# EAGLE board eeZeeProp (EAGLE 6.3)
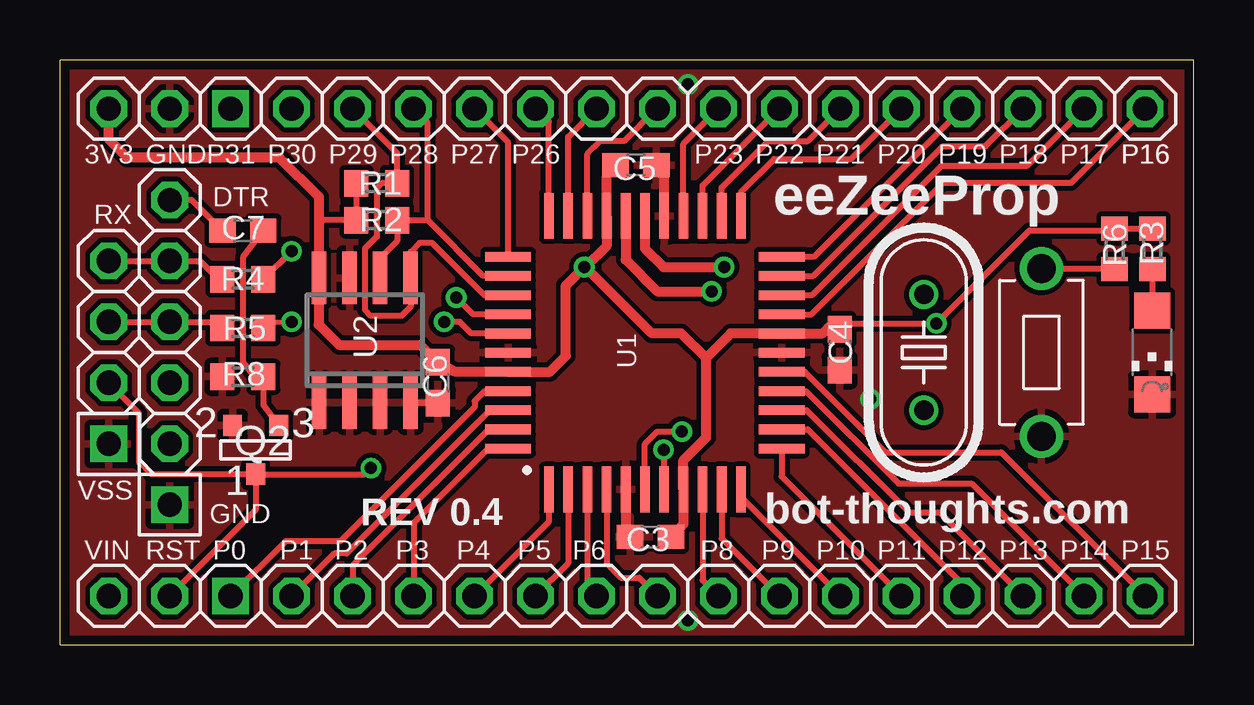
[diagram p0: board, top side]
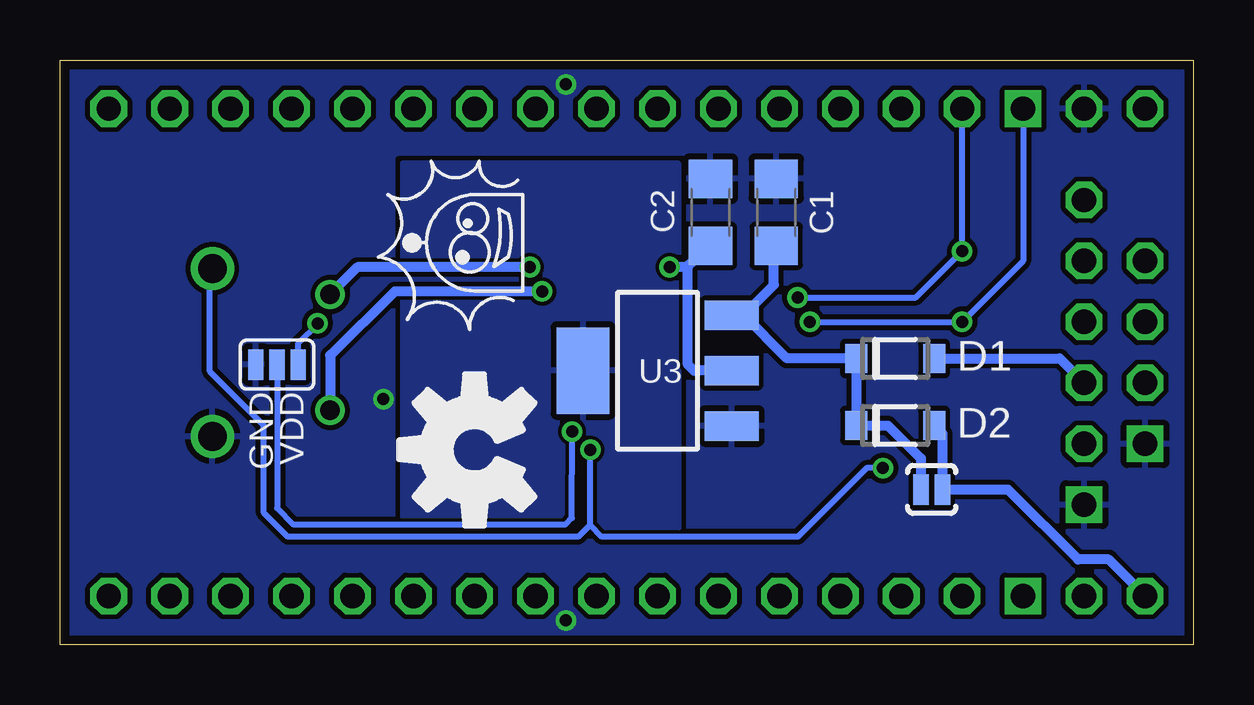
[diagram p1: board, bottom side, seen from below]

Size 47.24 x 24.38 mm. Coordinates in mm from the lower left corner, seen from the top.
Outline: 47.24,0 47.24,24.38 0,24.38 0,0 47.24,0
Copper layers (1*16): Top 0.0356mm / dielectric 1.5011mm / Bottom 0.0356mm
Design rules "default": minimum track width 6mil, minimum drill 13mil, track to track 6mil, track to pad 6mil, pad to pad 6mil, via to via 6mil, smd to smd 6mil, copper to edge 15mil, drill to drill 6mil, minimum pad ring 7mil, minimum via ring 7mil, stop-mask expansion 4mil, vias tented up to drill 20mil, thermal gap 10mil

## Footprints (pad centres in the part's own frame; a part is rotated, then mirrored left to right if it is on the bottom)
C1206 = smd 1.6 x 1.8: 1 -1.4,0; 2 1.4,0
C0603 = smd 1.1 x 1: 1 -0.85,0; 2 0.85,0
SOD123FL = smd 0.91 x 1.22: A 1.625,0; C -1.625,0
1X16-S = drill 1.016 square: 1 -19.05,0 | drill 1.016 octagon: 2 -16.51,0; 3 -13.97,0; 4 -11.43,0; 5 -8.89,0; 6 -6.35,0; 7 -3.81,0; 8 -1.27,0; 9 1.27,0; 10 3.81,0; 11 6.35,0; 12 8.89,0; 13 11.43,0; 14 13.97,0; 15 16.51,0; 16 19.05,0
1X01 = drill 1.016 octagon: 1 0,0
1X04-S = drill 1.016 square: 1 -3.81,0 | drill 1.016 octagon: 2 -1.27,0; 3 1.27,0; 4 3.81,0
1X06-S = drill 1.016 square: 1 -6.35,0 | drill 1.016 octagon: 2 -3.81,0; 3 -1.27,0; 4 1.27,0; 5 3.81,0; 6 6.35,0
CHIPLED_1206 = smd 1.5 x 1.5: A 0,-1.75; C 0,1.75
HC49U-V = drill 0.813: 1 -2.413,0; 2 2.413,0
SOT-23 = smd 0.787 x 0.889: 1 0.025,-1.016; 2 -0.94,1.016; 3 0.991,1.016
R0603 = smd 1 x 1.1: 1 -0.85,0; 2 0.85,0
SJ_2S-NO = smd 0.635 x 1.27: 1 -0.45,0; 2 0.45,0
SJ_3 = smd 0.635 x 1.27: 1 -0.889,0; 2 0,0; 3 0.889,0
6MMTACTILE_RECT = drill 1.2: P$1 -3.5,0; P$2 3.5,0
P8X32A-Q44 = smd 1.9 x 0.4: 1 -5.713,4.013; 2 -5.713,3.212; 3 -5.713,2.413; 4 -5.713,1.613; 5 -5.713,0.812; 6 -5.713,0.013; 7 -5.713,-0.787; 8 -5.713,-1.587; 9 -5.713,-2.388; 10 -5.713,-3.188; 11 -5.713,-3.987; 23 5.688,-3.987; 24 5.688,-3.188; 25 5.688,-2.388; 26 5.688,-1.587; 27 5.688,-0.787; 28 5.688,0.013; 29 5.688,0.812; 30 5.688,1.613; 31 5.688,2.413; 32 5.688,3.212; 33 5.688,4.013 | smd 0.4 x 1.9: 12 -4.013,-5.688; 13 -3.212,-5.688; 14 -2.413,-5.688; 15 -1.613,-5.688; 16 -0.812,-5.688; 17 -0.013,-5.688; 18 0.787,-5.688; 19 1.587,-5.688; 20 2.388,-5.688; 21 3.188,-5.688; 22 3.987,-5.688; 34 3.987,5.713; 35 3.188,5.713; 36 2.388,5.713; 37 1.587,5.713; 38 0.787,5.713; 39 -0.013,5.713; 40 -0.812,5.713; 41 -1.613,5.713; 42 -2.413,5.713; 43 -3.212,5.713; 44 -4.013,5.713
SO-08 = smd 0.6 x 2.2: 1 -1.905,-2.6; 2 -0.635,-2.6; 3 0.635,-2.6; 4 1.905,-2.6; 5 1.905,2.6; 6 0.635,2.6; 7 -0.635,2.6; 8 -1.905,2.6
SOT223 = smd 1.219 x 2.235: 1 -2.311,-3.099; 2 0,-3.099; 3 2.311,-3.099 | smd 3.6 x 2.2: 4 0,3.099

## Placement (x,y rotation side)
C1  10uF  [C1206]  17.4,18.03 90 bottom
C2  10uF  [C1206]  20.14,18.03 90 bottom
C3  0.1uF  [C0603]  24.6,4.5 180 top
C4  0.1uF  [C0603]  32.49,12.3 270 top
C5  0.1uF  [C0603]  24,20 0 top
C6  0.1uF  [C0603]  15.75,10.92 270 top
C7  0.1uF  [C0603]  7.62,17.27 180 top
D1  MBR130LSFT1  [SOD123FL]  12.45,11.94 0 bottom
D2  MBR130LSFT1  [SOD123FL]  12.45,9.14 0 bottom
JP1  [1X16-S]  26.16,22.35 0 top
JP2  VIN  [1X01]  2.03,2.03 0 top
JP3  PROP PLUG  [1X04-S]  2.03,12.19 90 top
JP4  FTDI  [1X06-S]  4.57,12.19 90 top
JP5  [1X16-S]  26.16,2.03 0 top
JP6  GND  [1X01]  4.57,22.35 0 top
JP7  !RES  [1X01]  4.57,2.03 0 top
JP8  3V3  [1X01]  2.03,22.35 0 top
LED1  green  [CHIPLED_1206]  45.5,12.19 180 top
Q1  5MHz  [HC49U-V]  35.99,12.19 90 top
Q2  2N3904SMD  [SOT-23]  8.13,8.13 0 top
R1  10k  [R0603]  13.2,19.25 180 top
R2  10k  [R0603]  13.2,17.7 180 top
R3  330  [R0603]  45.52,16.51 90 top
R4  1k  [R0603]  7.62,15.24 0 top
R5  1k  [R0603]  7.62,13.21 0 top
R6  1k  [R0603]  43.94,16.51 270 top
R8  10k  [R0603]  7.62,11.18 0 top
SJ1  BYPASS  [SJ_2S-NO]  10.92,6.48 180 bottom
SJ2  !BOE  [SJ_3]  38.2,11.68 0 bottom
SW1  RESET  [6MMTACTILE_RECT]  40.89,12.19 270 top
U1  P8X32A-Q44  [P8X32A-Q44]  24.38,12.19 90 top
U2  24LC256-I/ST  [SO-08]  12.7,12.7 0 top
U3  NCP1117 3V3  [SOT223]  22.35,11.43 90 bottom

## Library data of the parts
C1 C2 = rcl; PARTNO: T491A106M006AT; SIZE: (0603); TC: X5R; TOL: 20%; TYPE: CER; VOLT: 10V
C3-C5 = rcl; PARTNO: 0603YC104KAT2A; SIZE: (0603); TC: X5R; TOL: 20%; TYPE: CER; VOLT: 10V
C6 = rcl; DATABASE: ./../../eagle/PARTSDB.txt; PARTNO: 0603YC104KAT2A; SIZE: (0603); TC: X5R; TOL: 20%; TYPE: CER; VOLT: 10V
C7 = rcl; PARTNO: 0603YC104KAT2A
D1 D2 = mes_diode; PARTNO: MBR130LSFT1G
JP1 JP2 JP8 = pinhead-2; DATABASE: ./../../eagle/PARTSDB.txt
JP3 JP5-JP7 = pinhead-2
JP4 = pinhead-2; PARTNO: 2211S-06G
LED1 = led; PARTNO: LG N971-KN-1
Q1 = crystal; OC_FARNELL: 1666969; OC_NEWARK: unknown; PARTNO: HC49US-5.000MABJ-UB
Q2 = mes_transistors; PARTNO: MMBT3904LT3G
R1 = rcl; PARTNO: ERJ-3GEYJ103V; POWER: 100mW; RATE: 100mW; SIZE: (0603); TOL: 5%; TOLERANCE: 5%; TYPE: thick film; VENDOR: Newark; VOLTAGE: 75V; VPN: 52K8066
R2 = rcl; PARTNO: ERJ-3GEYJ103V; RATE: 100mW; SIZE: (0603); TOL: 5%
R3 = rcl; PARTNO: ERJ-3GEYJ331V; POWER: 100mW; TOLERANCE: 5%; TYPE: thick film; VENDOR: Newark; VPN: 59M6805
R4-R6 = rcl; DATABASE: ./../../eagle/PARTSDB.txt; PARTNO: RC0603JR-071KL; RATE: 100mW; SIZE: (0603); TOL: 5%
R8 = rcl; DATABASE: ./../../../eagle/PARTSDB.txt; PARTNO: ERJ-3GEYJ103V; RATE: 100mW; SIZE: (0603); TOL: 5%
SJ1 SJ2 = SparkFun
SW1 = mes_electromech; PARTNO: MJTP1243
U1 = parallax_propeller; PARTNO: P8X32A-Q44
U2 = microchip; MF: OnSemi; MPN: CAT24C256WI-GT3; OC_FARNELL: 9757937; OC_NEWARK: 30H1511; PARTNO: CAT24C256WI-GT3
U3 = SparkFun; PARTNO: NCP1117ST33T3G

## Nets
!BOE: SJ2.2 U1.6
!RES: JP3.2 JP7.1 Q2.1 R6.2 SW1.P$1 U1.7
DTR: C7.2 JP4.6
GND: C1.2 C2.2 C3.2 C4.2 C5.2 C6.2 JP3.1 JP4.1 JP6.1 LED1.C Q2.2 R8.1 SJ2.1 SW1.P$2 U1.5 U1.17 U1.27 U1.39 U2.1 U2.2 U2.3 U2.4 U2.7 U3.1
HEATSINK: U3.4
N$1: JP5.1 U1.41
N$2: JP5.2 U1.42
N$3: JP5.3 U1.43
N$4: JP5.4 U1.44
N$5: LED1.A R3.1
N$6: JP5.5 U1.1
N$8: JP5.6 U1.2
N$9: JP5.7 U1.3
N$10: JP5.8 U1.4
N$11: JP5.9 U1.9
N$12: JP5.10 U1.10
N$13: JP5.11 U1.11
N$14: JP5.12 U1.12
N$15: JP5.13 U1.13
N$16: JP5.14 U1.14
N$17: JP5.15 U1.15
N$18: JP5.16 U1.16
N$19: JP1.5 U1.34
N$20: JP1.6 U1.33
N$21: JP1.7 U1.32
N$22: JP1.8 U1.31
N$23: JP1.9 U1.26
N$24: JP1.10 U1.25
N$25: JP1.11 U1.24
N$26: JP1.12 U1.23
N$27: JP1.13 U1.22
N$28: JP1.14 U1.21
N$29: JP1.15 U1.20
N$30: JP1.16 U1.19
N$31: C7.1 Q2.3 R8.2
N$34: JP3.4 JP4.5 R4.1
N$35: JP3.3 JP4.4 R5.1
P28: JP1.4 R2.1 U1.35 U2.6
P29: JP1.3 R1.1 U1.36 U2.5
P30: JP1.2 R4.2 U1.37
P31: JP1.1 R5.2 U1.38
V+: C1.1 D1.C D2.C SJ1.2 U3.3
VDD: C2.1 C3.1 C4.1 C5.1 C6.1 JP8.1 R1.2 R2.2 R3.2 R6.1 SJ2.3 U1.8 U1.18 U1.30 U1.40 U2.8 U3.2
VIN: D2.A JP2.1 SJ1.1
VUSB: D1.A JP4.3
XI: Q1.2 U1.28
XO: Q1.1 U1.29

## Tracks (layer width: path | path; a pad name or v marks a point on that pad's centre or on a via)
!BOE  (via drill 0.5)
  Top 0.254: U1.6 24.37,8.37 24.89,8.89 v25.91,8.89
  Bottom 0.254: v25.91,8.89 25.91,5.28 26.2,5 37.5,5 38.2,5.7 SJ2.2
!RES  (via drill 0.5)
  Top 0.254: Q2.1 8.15,5.61 JP7.1 | Q2.1 3.81,7.11 3.3,7.62 3.3,9.65 JP3.2 | Q2.1 12.7,7.11 v12.95,7.37 | v25.15,8.13 25.15,6.5 U1.7 | R6.2 40.89,15.66 SW1.P$1
  Bottom 0.254: v12.95,7.37 13.63,7.37 16.5,4.5 24.67,4.5 25.16,4.99 | 25.16,4.99 v25.15,8.13 | 25.16,4.99 25.65,4.5 37.75,4.5 38.75,5.5 38.75,9.14 41,11.4 41,15.59 SW1.P$1
DTR
  Top 0.254: C7.2 6.76,17.27 5.49,18.54 JP4.6
GND  (via drill 0.5)
  Top 0.254: 25.17,19.68 C5.2 | C6.2 14.64,10.07 14.48,10.16
  Top 0.406: U1.5 23.57,4.68 C3.2 | U1.27 25.17,19.53 24.89,19.81
  other vias: 26.16,23.37 26.16,1.02 33.77,10.24
  pour Bottom (isolate 0.203, rank 3): 0,24.13 47.24,24.13 47.24,0.25 0,0.25
  pour Top (isolate 0.203, rank 5): 0.25,24.13 46.99,24.13 46.99,0.25 0.25,0.25
HEATSINK
  pour Bottom: 21.49,20.08 21.49,4.84 32.94,4.84 32.94,20.08
N$1
  Top 0.254: U1.41 17.69,10.58 17.27,10.16 17.27,9.91 11.68,4.32 9.4,4.32 JP5.1
N$2
  Top 0.254: U1.42 17.91,9.78 11.94,3.81 11.43,3.81 JP5.2
N$3
  Top 0.254: U1.43 17.87,8.98 12.19,3.3 JP5.3
N$4
  Top 0.254: JP5.4 14.73,5.08 17.91,8.26 U1.44
N$5
  Top 0.254: R3.1 LED1.A
N$6
  Top 0.254: U1.1 20.37,5.13 JP5.5
N$8
  Top 0.254: U1.2 21.17,3.39 JP5.6
N$9
  Top 0.254: U1.3 21.97,2.41 JP5.7
N$10
  Top 0.254: U1.4 22.77,3.39 23.37,2.79 24.13,2.79 JP5.8
N$11
  Top 0.254: U1.9 26.77,2.69 JP5.9
N$12
  Top 0.254: U1.10 27.57,4.43 JP5.10
N$13
  Top 0.254: U1.11 28.37,6.17 JP5.11
N$14
  Top 0.254: U1.12 30.07,7.01 JP5.12
N$15
  Top 0.254: U1.13 31.15,8.98 37.59,2.54 JP5.13
N$16
  Top 0.254: U1.14 31.11,9.78 35.38,5.51 36.65,5.51 JP5.14
N$17
  Top 0.254: U1.15 31.08,10.58 34.94,6.72 37.99,6.72 JP5.15
N$18
  Top 0.254: U1.16 31.04,11.38 34.39,8.03 39.22,8.03 JP5.16
N$19
  Top 0.254: U1.34 18.67,20.95 JP1.5
N$20
  Top 0.254: U1.33 20.37,21.79 JP1.6
N$21
  Top 0.254: U1.32 21.17,21.17 JP1.7
N$22
  Top 0.254: U1.31 21.97,20.47 22.5,21 23.5,21 24.85,22.35 JP1.8
N$23
  Top 0.254: U1.26 25.97,20.89 JP1.9
N$24
  Top 0.254: U1.25 26.77,19.15 JP1.10
N$25
  Top 0.254: U1.24 27.57,19.07 29.5,21 31.16,21 JP1.11
N$26
  Top 0.254: U1.23 28.37,18.87 29.75,20.25 32.95,20.25 JP1.12
N$27
  Top 0.254: U1.22 31.42,16.18 JP1.13
N$28
  Top 0.254: U1.21 31.38,15.38 36.78,20.78 38.56,20.78 JP1.14
N$29
  Top 0.254: U1.20 31.34,14.58 36.74,19.97 40.29,19.97 JP1.15
N$30
  Top 0.254: U1.19 31.3,13.78 36.79,19.27 42.13,19.27 JP1.16
N$31
  Top 0.254: C7.1 7.64,16.19 7.64,11.76 8.47,10.73 R8.2 8.47,10 Q2.3
N$34
  Top 0.254: JP3.4 JP4.5 5.84,16 6.35,15.49 R4.1
N$35
  Top 0.254: JP3.3 JP4.4 6.35,13.46 R5.1
P28
  Top 0.254: 15.32,17.7 R2.1 14.04,16.84 13.34,16.13 U2.6 | U1.35 17.64,15.38 15.32,17.7 | 15.32,17.7 15.32,21.77 JP1.4
P29
  Top 0.254: U1.36 17.68,14.58 15.49,16.76 14.99,16.76 14.61,16.38 U2.5 14.61,14.1 14.22,13.72 12.95,13.72 12.7,13.97 12.7,16.51 13.21,17.02 13.21,19.05 13.4,19.25 R1.1 14.04,20.5 JP1.3
P30  (via drill 0.5 pad 0.41)
  Top 0.254: U1.37 17.21,13.78 v16.51,14.48 | v9.65,16.41 R4.2
  Bottom 0.254: v16.51,14.48 11.58,14.48 v9.65,16.41 JP1.2
P31  (via drill 0.5 pad 0.41)
  Top 0.203: R5.2 8.72,13.45 v9.65,13.46
  Top 0.254: U1.38 17.14,12.98 16.66,13.46 v16,13.46
  Bottom 0.254: v16,13.46 v9.65,13.46 7.11,16 JP1.1
V+
  Bottom 0.406: SJ1.2 11.38,7.77 12.75,9.14 D2.C D1.C 16.95,11.94 18.76,13.74 | U3.3 18.76,13.74 | 18.76,13.74 17.5,15 17.5,16.53 C1.1
VDD  (via drill 0.5)
  Top 0.254: C4.1 32.54,13.4 v36.51,13.4 40.39,17.27 43.85,17.27 R6.1 R3.2 | 22.77,19.48 23.1,19.81 23.1,19.95 C5.1 | R1.2 R2.2 10.97,17.7 10.79,17.53
  Top 0.406: 45.49,17.27 R3.2 | JP8.1 2.03,21.08 2.79,20.32 9.14,20.32 10.79,18.67 10.79,17.53 U2.8 10.78,13.35 11.63,12.5 15.02,12.5 C6.1 16.47,11.38 U1.40 20.42,11.38 21.08,12.05 21.08,14.99 v21.84,15.75 21.89,15.75 | C3.1 25.97,5.02 U1.8 25.97,7.68 26.92,8.64 26.92,11.96 | C4.1 32.43,13.21 32,13.21 31.78,12.98 U1.18 27.94,12.98 26.92,11.96 | 22.77,19.48 U1.30 22.77,16.62 21.89,15.75 | 26.92,11.96 25.91,12.95 25.88,12.98 24.66,12.98 21.89,15.75
  Bottom 0.254: v36.51,13.4 36.51,13.37 37.31,12.57 SJ2.3
  Bottom 0.406: U3.2 20.83,11.43 21.08,11.68 21.08,15.75 | 21.08,15.75 21.08,15.8 C2.1 | 21.08,15.75 v21.84,15.75
VIN
  Bottom 0.406: JP2.1 3.56,3.56 4.83,3.56 7.75,6.48 SJ1.1 10.47,8.79 D2.A
VUSB
  Bottom 0.406: D1.A 5.59,11.94 JP4.3
XI  (via drill 0.5)
  Top 0.406: U1.28 24.37,16.52 25.15,15.75 v27.67,15.75
  Bottom 0.406: v27.67,15.75 34.85,15.75 Q1.2
XO  (via drill 0.5)
  Top 0.406: U1.29 23.57,16.05 24.89,14.73 v27.15,14.73
  Bottom 0.406: v27.15,14.73 33.29,14.73 35.97,12.09 35.99,12.06 Q1.1

## Text on the board
tPlace: 3V3 | GND | P31 | P30 | P29 | P28 | P27 | P26 | P23 | P22 | P21 | P20 | P19 | P18 | P17 | P16 | RX | DTR | eeZeeProp | VSS | GND | REV 0.4 | bot-thoughts.com | VIN | RST | P0 | P1 | P2 | P3 | P4 | P5 | P6 | P8 | P9 | P10 | P11 | P12 | P13 | P14 | P15
tNames: P16
bNames: VDD | GND
Document: NOTE: Reconsider Regulator, 10uF caps Newark: C3216X5R1C106M 16V 10uF
_tsilk: 3V3 | GND | P31 | P30 | P29 | P28 | P27 | P26 | P23 | P22 | P21 | P20 | P19 | P18 | P17 | P16 | P16 | RX | DTR | eeZeeProp | RESET | VSS | REV 0.3 | GND | bot-thoughts.com | VIN | RST | P0 | P1 | P2 | P3 | P4 | P5 | P6 | P8 | P9 | P10 | P11 | P12 | P13 | P14 | P15
_bsilk: !BOE | !BOE | VDD | GND | BYPASS